# EAGLE board SparkFun RTK Facet - Display SD-Panel (EAGLE 9.6.2), part 1 of 3
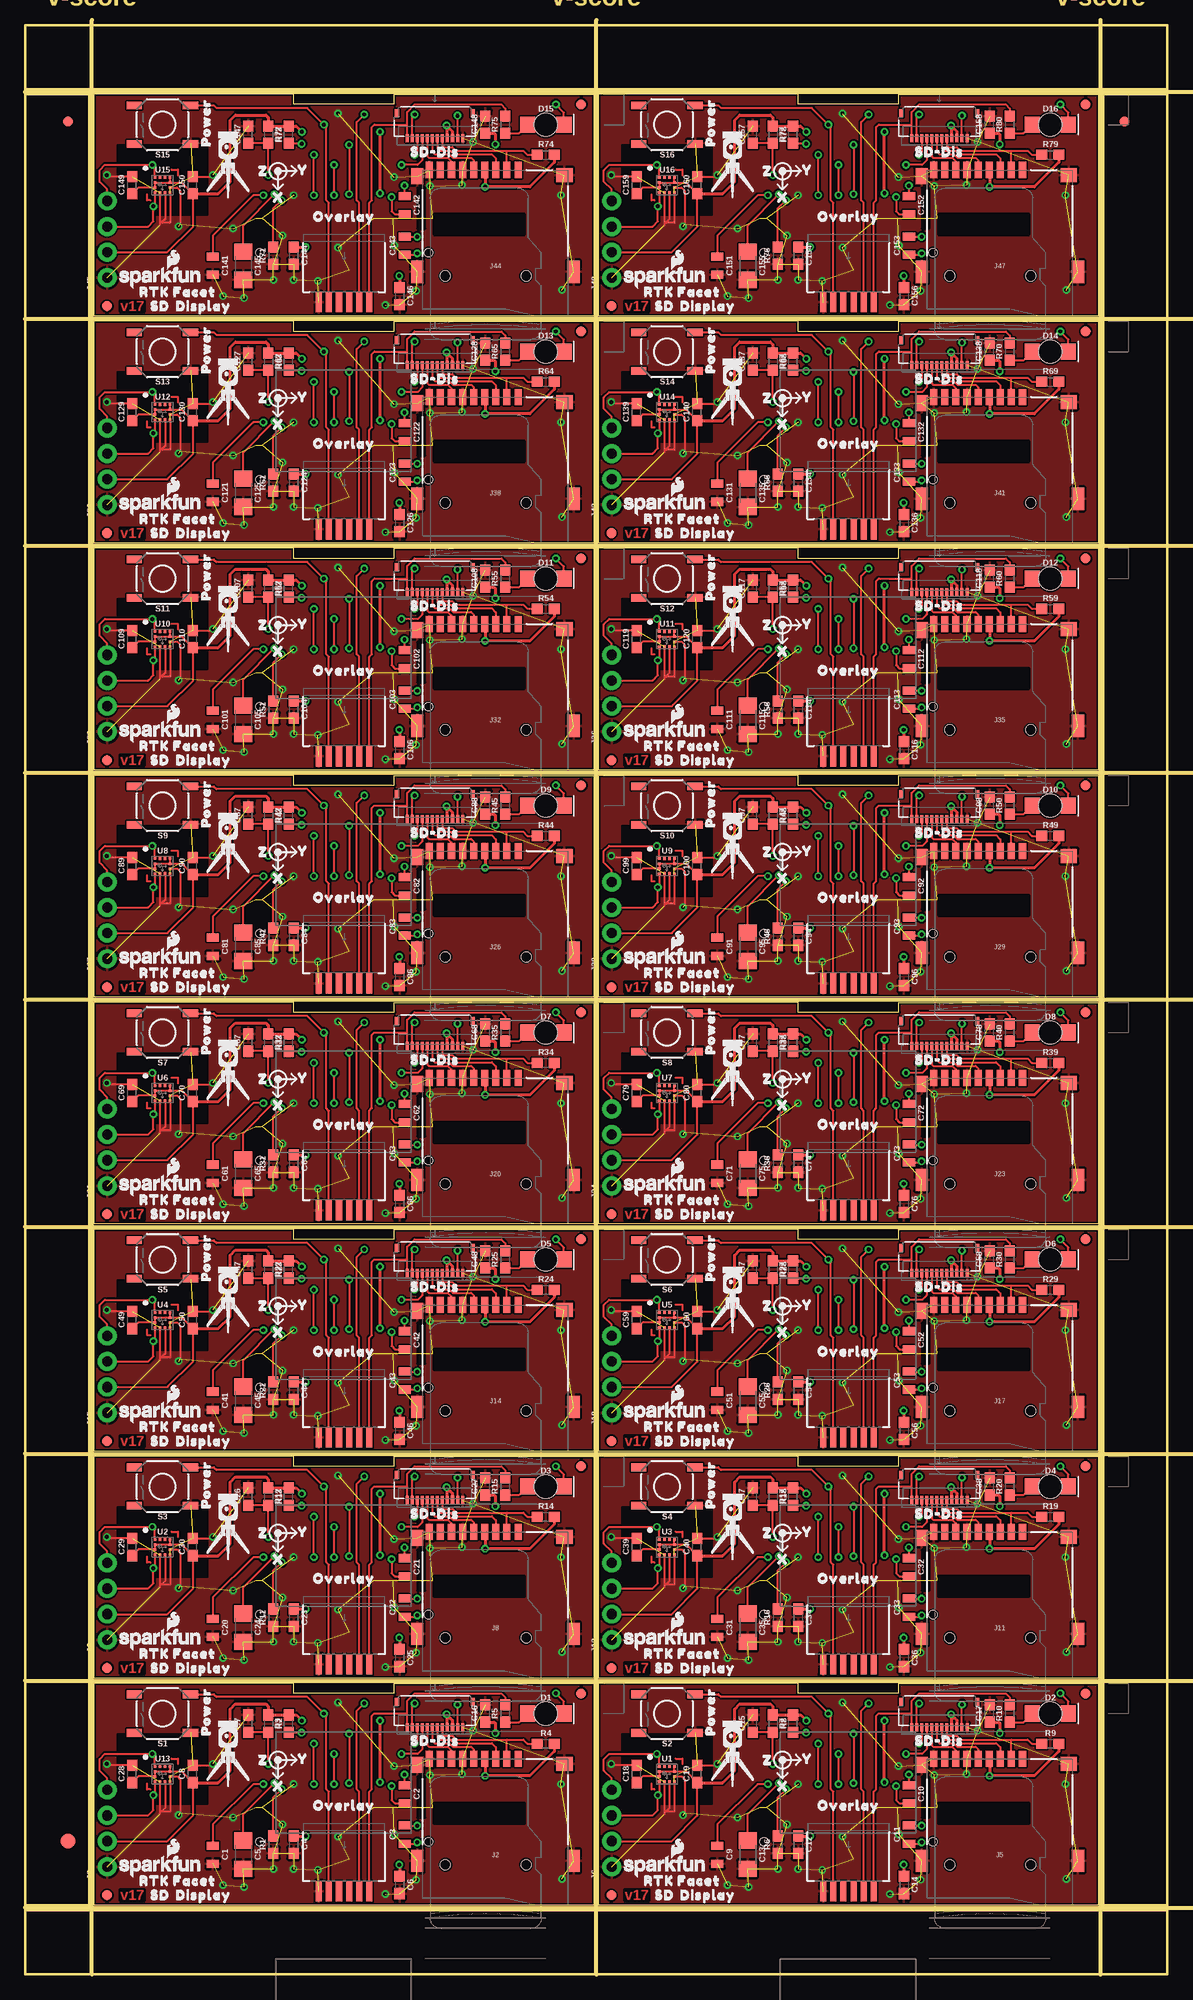
[diagram p0: board, top side]
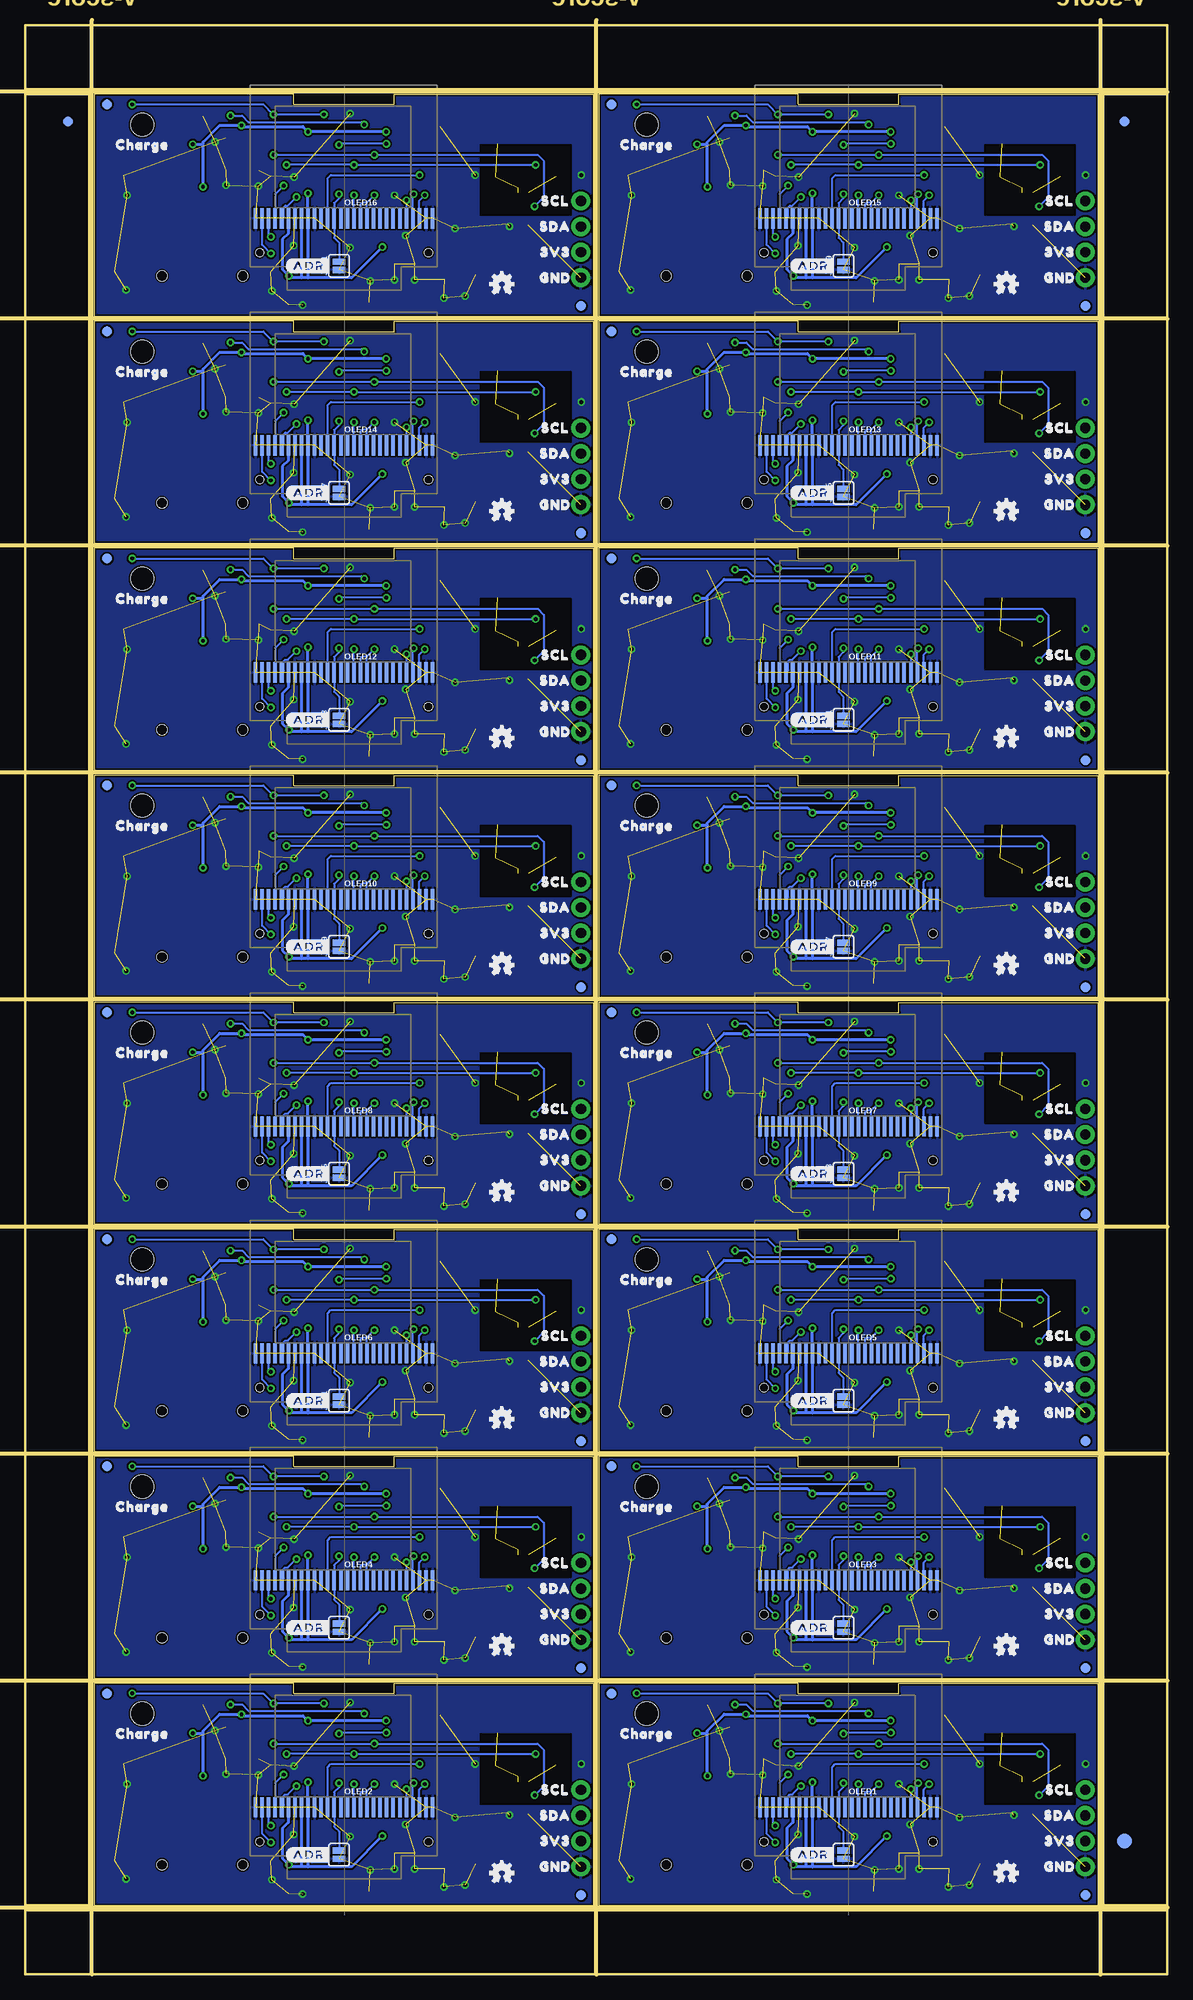
[diagram p1: board, bottom side, seen from below]

Size 113.22 x 193.27 mm. Coordinates in mm from the lower left corner, seen from the top.
Outline: 144 segments
Copper layers (1*16): Top 0.035mm / dielectric 1.5mm / Bottom 0.035mm
Design rules "SparkFun RTK Facet - Display SD": minimum track width 7mil, minimum drill 15mil, track to track 7mil, track to pad 7mil, pad to pad 7mil, via to via 7mil, smd to smd 7mil, copper to edge 7mil, drill to drill 7mil, minimum pad ring 7mil, minimum via ring 7mil, stop-mask expansion 4mil, vias tented up to drill 25mil, thermal gap 10mil
Net classes: 0 default: width 0.127 mm; 1 power: width 0.178 mm
tKeepout: area 54.4,6.9 to 56.4,28.9; area 6.9,6.9 to 8.9,28.9; area 104.4,6.9 to 106.4,28.9; area 56.9,6.9 to 58.9,28.9; area 54.4,29.4 to 56.4,51.4; area 6.9,29.4 to 8.9,51.4; area 104.4,29.4 to 106.4,51.4; area 56.9,29.4 to 58.9,51.4; area 54.4,51.9 to 56.4,73.9; area 6.9,51.9 to 8.9,73.9; area 104.4,51.9 to 106.4,73.9; area 56.9,51.9 to 58.9,73.9; 20 more areas
bKeepout: area 54.4,6.9 to 56.4,28.9; area 6.9,6.9 to 8.9,28.9; area 104.4,6.9 to 106.4,28.9; area 56.9,6.9 to 58.9,28.9; area 54.4,29.4 to 56.4,51.4; area 6.9,29.4 to 8.9,51.4; area 104.4,29.4 to 106.4,51.4; area 56.9,29.4 to 58.9,51.4; area 54.4,51.9 to 56.4,73.9; area 6.9,51.9 to 8.9,73.9; area 104.4,51.9 to 106.4,73.9; area 56.9,51.9 to 58.9,73.9; 20 more areas
Milling: 12 lines

## Footprints (pad centres in the part's own frame; a part is rotated, then mirrored left to right if it is on the bottom)
0805 = smd 0.8 x 1.2: 1 -0.9,0; 2 0.9,0
0603 = smd 1.1 x 1: 1 -0.85,0; 2 0.85,0
1206 = smd 1.6 x 1.8: 1 -1.4,0; 2 1.4,0
LED-1206-BOTTOM = smd 1.5 x 1.6: A -1.8,0; C 1.8,0 | hole 2.3: 0,0
FIDUCIAL-1X2 = smd 1 x 1: 1 0,0
FIDUCIAL-1.5X3 = smd 1.5 x 1.5: 1 0,0
FPC_12_DOUBLESIDED_BACKFLIP = smd 0.3 x 0.8: 1 -2.75,1.35; 2 -2.25,1.35; 3 -1.75,1.35; 4 -1.25,1.35; 5 -0.75,1.35; 6 -0.25,1.35; 7 0.25,1.35; 8 0.75,1.35; 9 1.25,1.35; 10 1.75,1.35; 11 2.25,1.35; 12 2.75,1.35 | smd 0.4 x 0.8: MP1 -3.75,-1.15; MP2 3.75,-1.15
MICROSD-EXTERNALPIN = smd 0.7 x 1.6: 1 2.25,10.5; 2 1.15,10.5; 3 0.05,10.5; 4 -1.05,10.5; 5 -2.15,10.5; 6 -3.25,10.5; 7 -4.35,10.5; 8 -5.45,10.5; 9 -6.55,10.5 | smd 1.2 x 1.6: 10 -7.75,9.9 | smd 1.2 x 2.2: 11 -7.75,0.4; 12 7.75,0.4 | smd 1.6 x 1.4: 13 6.85,10 | hole 1: 3.05,0; -4.95,0
1X04_NO_SILK = drill 1.016 pad 1.88: 1 0,0; 2 2.54,0; 3 5.08,0; 4 7.62,0
FPC_6_1MM-LIF = smd 0.6 x 2: 1 -2.5,3; 2 -1.5,3; 3 -0.5,3; 4 0.5,3; 5 1.5,3; 6 2.5,3
SMT-JUMPER_2_NO_SILK = smd 0.635 x 1.27: 1 -0.406,0; 2 0.406,0
OLED-0.66-64X48 = smd 0.35 x 2: 1 -8.775,0; 2 -8.125,0; 3 -7.475,0; 4 -6.825,0; 5 -6.175,0; 6 -5.525,0; 7 -4.875,0; 8 -4.225,0; 9 -3.575,0; 10 -2.925,0; 11 -2.275,0; 12 -1.625,0; 13 -0.975,0; 14 -0.325,0; 15 0.325,0; 16 0.975,0; 17 1.625,0; 18 2.275,0; 19 2.925,0; 20 3.575,0; 21 4.225,0; 22 4.875,0; 23 5.525,0; 24 6.175,0; 25 6.825,0; 26 7.475,0; 27 8.125,0; 28 8.775,0 | hole 0.8: 8.375,-3.4; -8.375,-3.4
TACTILE_SWITCH_SMD_5.2MM = smd 1.524 x 0.762: 1 -2.794,1.905; 2 2.794,1.905; 3 -2.794,-1.905; 4 2.794,-1.905
LGA-12-LISDH12-NOSILK = smd 0.275 x 0.25: 1 -0.75,0.75; 2 -0.75,0.25; 3 -0.75,-0.25; 4 -0.75,-0.75; 7 0.75,-0.75; 8 0.75,-0.25; 9 0.75,0.25; 10 0.75,0.75 | smd 0.25 x 0.275: 5 -0.25,-0.75; 6 0.25,-0.75; 11 0.25,0.75; 12 -0.25,0.75

## Placement (x,y rotation side)
C1  2.2uF  [0805]  18.61,11.86 270 top
C2  1.0uF  [0805]  37.61,17.86 270 top
C3  1.0uF  [0805]  37.61,13.86 90 top
C4  1.0uF  [0603]  26.61,12.86 270 top
C5  4.7uF  [1206]  21.61,11.86 270 top
C6  1.0uF  [0603]  37.11,8.86 270 top
C7  1.0uF  [0603]  22.11,24.86 90 top
C8  10uF  [0603]  16.61,19.86 90 top
C9  2.2uF  [0805]  68.62,11.86 270 top
C10  1.0uF  [0805]  87.62,17.86 270 top
C11  1.0uF  [0805]  87.62,13.86 90 top
C12  1.0uF  [0603]  76.62,12.86 270 top
C13  4.7uF  [1206]  71.62,11.86 270 top
C14  1.0uF  [0603]  87.12,8.86 270 top
C15  1.0uF  [0603]  72.12,24.86 90 top
C16  0.1uF  [0603]  45.61,25.86 90 top
C17  0.1uF  [0603]  95.62,25.86 90 top
C18  0.1uF  [0603]  60.62,19.86 90 top
C19  10uF  [0603]  66.62,19.86 90 top
C20  2.2uF  [0805]  18.61,34.36 270 top
C21  1.0uF  [0805]  37.61,40.36 270 top
C22  1.0uF  [0805]  37.61,36.36 90 top
C23  1.0uF  [0603]  26.61,35.36 270 top
C24  4.7uF  [1206]  21.61,34.36 270 top
C25  1.0uF  [0603]  37.11,31.36 270 top
C26  1.0uF  [0603]  22.11,47.36 90 top
C27  0.1uF  [0603]  45.61,48.36 90 top
C28  0.1uF  [0603]  10.61,19.86 90 top
C29  0.1uF  [0603]  10.61,42.36 90 top
C30  10uF  [0603]  16.61,42.36 90 top
C31  2.2uF  [0805]  68.62,34.36 270 top
C32  1.0uF  [0805]  87.62,40.36 270 top
C33  1.0uF  [0805]  87.62,36.36 90 top
C34  1.0uF  [0603]  76.62,35.36 270 top
C35  4.7uF  [1206]  71.62,34.36 270 top
C36  1.0uF  [0603]  87.12,31.36 270 top
C37  1.0uF  [0603]  72.12,47.36 90 top
C38  0.1uF  [0603]  95.62,48.36 90 top
C39  0.1uF  [0603]  60.62,42.36 90 top
C40  10uF  [0603]  66.62,42.36 90 top
C41  2.2uF  [0805]  18.61,56.87 270 top
C42  1.0uF  [0805]  37.61,62.87 270 top
C43  1.0uF  [0805]  37.61,58.87 90 top
C44  1.0uF  [0603]  26.61,57.87 270 top
C45  4.7uF  [1206]  21.61,56.87 270 top
C46  1.0uF  [0603]  37.11,53.87 270 top
C47  1.0uF  [0603]  22.11,69.87 90 top
C48  0.1uF  [0603]  45.61,70.87 90 top
C49  0.1uF  [0603]  10.61,64.87 90 top
C50  10uF  [0603]  16.61,64.87 90 top
C51  2.2uF  [0805]  68.62,56.87 270 top
C52  1.0uF  [0805]  87.62,62.87 270 top
C53  1.0uF  [0805]  87.62,58.87 90 top
C54  1.0uF  [0603]  76.62,57.87 270 top
C55  4.7uF  [1206]  71.62,56.87 270 top
C56  1.0uF  [0603]  87.12,53.87 270 top
C57  1.0uF  [0603]  72.12,69.87 90 top
C58  0.1uF  [0603]  95.62,70.87 90 top
C59  0.1uF  [0603]  60.62,64.87 90 top
C60  10uF  [0603]  66.62,64.87 90 top
C61  2.2uF  [0805]  18.61,79.38 270 top
C62  1.0uF  [0805]  37.61,85.38 270 top
C63  1.0uF  [0805]  37.61,81.38 90 top
C64  1.0uF  [0603]  26.61,80.38 270 top
C65  4.7uF  [1206]  21.61,79.38 270 top
C66  1.0uF  [0603]  37.11,76.38 270 top
C67  1.0uF  [0603]  22.11,92.38 90 top
C68  0.1uF  [0603]  45.61,93.38 90 top
C69  0.1uF  [0603]  10.61,87.38 90 top
C70  10uF  [0603]  16.61,87.38 90 top
C71  2.2uF  [0805]  68.62,79.38 270 top
C72  1.0uF  [0805]  87.62,85.38 270 top
C73  1.0uF  [0805]  87.62,81.38 90 top
C74  1.0uF  [0603]  76.62,80.38 270 top
C75  4.7uF  [1206]  71.62,79.38 270 top
C76  1.0uF  [0603]  87.12,76.38 270 top
C77  1.0uF  [0603]  72.12,92.38 90 top
C78  0.1uF  [0603]  95.62,93.38 90 top
C79  0.1uF  [0603]  60.62,87.38 90 top
C80  10uF  [0603]  66.62,87.38 90 top
C81  2.2uF  [0805]  18.61,101.89 270 top
C82  1.0uF  [0805]  37.61,107.89 270 top
C83  1.0uF  [0805]  37.61,103.89 90 top
C84  1.0uF  [0603]  26.61,102.89 270 top
C85  4.7uF  [1206]  21.61,101.89 270 top
C86  1.0uF  [0603]  37.11,98.89 270 top
C87  1.0uF  [0603]  22.11,114.89 90 top
C88  0.1uF  [0603]  45.61,115.89 90 top
C89  0.1uF  [0603]  10.61,109.89 90 top
C90  10uF  [0603]  16.61,109.89 90 top
C91  2.2uF  [0805]  68.62,101.89 270 top
C92  1.0uF  [0805]  87.62,107.89 270 top
C93  1.0uF  [0805]  87.62,103.89 90 top
C94  1.0uF  [0603]  76.62,102.89 270 top
C95  4.7uF  [1206]  71.62,101.89 270 top
C96  1.0uF  [0603]  87.12,98.89 270 top
C97  1.0uF  [0603]  72.12,114.89 90 top
C98  0.1uF  [0603]  95.62,115.89 90 top
C99  0.1uF  [0603]  60.62,109.89 90 top
C100  10uF  [0603]  66.62,109.89 90 top
C101  2.2uF  [0805]  18.61,124.4 270 top
C102  1.0uF  [0805]  37.61,130.4 270 top
C103  1.0uF  [0805]  37.61,126.4 90 top
C104  1.0uF  [0603]  26.61,125.4 270 top
C105  4.7uF  [1206]  21.61,124.4 270 top
C106  1.0uF  [0603]  37.11,121.4 270 top
C107  1.0uF  [0603]  22.11,137.4 90 top
C108  0.1uF  [0603]  45.61,138.4 90 top
C109  0.1uF  [0603]  10.61,132.4 90 top
C110  10uF  [0603]  16.61,132.4 90 top
C111  2.2uF  [0805]  68.62,124.4 270 top
C112  1.0uF  [0805]  87.62,130.4 270 top
C113  1.0uF  [0805]  87.62,126.4 90 top
C114  1.0uF  [0603]  76.62,125.4 270 top
C115  4.7uF  [1206]  71.62,124.4 270 top
C116  1.0uF  [0603]  87.12,121.4 270 top
C117  1.0uF  [0603]  72.12,137.4 90 top
C118  0.1uF  [0603]  95.62,138.4 90 top
C119  0.1uF  [0603]  60.62,132.4 90 top
C120  10uF  [0603]  66.62,132.4 90 top
C121  2.2uF  [0805]  18.61,146.91 270 top
C122  1.0uF  [0805]  37.61,152.91 270 top
C123  1.0uF  [0805]  37.61,148.91 90 top
C124  1.0uF  [0603]  26.61,147.91 270 top
C125  4.7uF  [1206]  21.61,146.91 270 top
C126  1.0uF  [0603]  37.11,143.91 270 top
C127  1.0uF  [0603]  22.11,159.91 90 top
C128  0.1uF  [0603]  45.61,160.91 90 top
C129  0.1uF  [0603]  10.61,154.91 90 top
C130  10uF  [0603]  16.61,154.91 90 top
C131  2.2uF  [0805]  68.62,146.91 270 top
C132  1.0uF  [0805]  87.62,152.91 270 top
C133  1.0uF  [0805]  87.62,148.91 90 top
C134  1.0uF  [0603]  76.62,147.91 270 top
C135  4.7uF  [1206]  71.62,146.91 270 top
C136  1.0uF  [0603]  87.12,143.91 270 top
C137  1.0uF  [0603]  72.12,159.91 90 top
C138  0.1uF  [0603]  95.62,160.91 90 top
C139  0.1uF  [0603]  60.62,154.91 90 top
C140  10uF  [0603]  66.62,154.91 90 top
C141  2.2uF  [0805]  18.61,169.41 270 top
C142  1.0uF  [0805]  37.61,175.41 270 top
C143  1.0uF  [0805]  37.61,171.41 90 top
C144  1.0uF  [0603]  26.61,170.41 270 top
C145  4.7uF  [1206]  21.61,169.41 270 top
C146  1.0uF  [0603]  37.11,166.41 270 top
C147  1.0uF  [0603]  22.11,182.41 90 top
C148  0.1uF  [0603]  45.61,183.41 90 top
C149  0.1uF  [0603]  10.61,177.41 90 top
C150  10uF  [0603]  16.61,177.41 90 top
C151  2.2uF  [0805]  68.62,169.41 270 top
C152  1.0uF  [0805]  87.62,175.41 270 top
C153  1.0uF  [0805]  87.62,171.41 90 top
C154  1.0uF  [0603]  76.62,170.41 270 top
C155  4.7uF  [1206]  71.62,169.41 270 top
C156  1.0uF  [0603]  87.12,166.41 270 top
C157  1.0uF  [0603]  72.12,182.41 90 top
C158  0.1uF  [0603]  95.62,183.41 90 top
C159  0.1uF  [0603]  60.62,177.41 90 top
C160  10uF  [0603]  66.62,177.41 90 top
D1  Green  [LED-1206-BOTTOM]  51.61,25.86 0 top
D2  Green  [LED-1206-BOTTOM]  101.62,25.86 0 top
D3  Green  [LED-1206-BOTTOM]  51.61,48.36 0 top
D4  Green  [LED-1206-BOTTOM]  101.62,48.36 0 top
D5  Green  [LED-1206-BOTTOM]  51.61,70.87 0 top
D6  Green  [LED-1206-BOTTOM]  101.62,70.87 0 top
D7  Green  [LED-1206-BOTTOM]  51.61,93.38 0 top
D8  Green  [LED-1206-BOTTOM]  101.62,93.38 0 top
D9  Green  [LED-1206-BOTTOM]  51.61,115.89 0 top
D10  Green  [LED-1206-BOTTOM]  101.62,115.89 0 top
D11  Green  [LED-1206-BOTTOM]  51.61,138.4 0 top
D12  Green  [LED-1206-BOTTOM]  101.62,138.4 0 top
D13  Green  [LED-1206-BOTTOM]  51.61,160.91 0 top
D14  Green  [LED-1206-BOTTOM]  101.62,160.91 0 top
D15  Green  [LED-1206-BOTTOM]  51.61,183.41 0 top
D16  Green  [LED-1206-BOTTOM]  101.62,183.41 0 top
E$1  [FIDUCIAL-1X2]  4.23,183.75 0 top
E$2  [FIDUCIAL-1X2]  4.23,183.75 0 bottom
E$3  [FIDUCIAL-1X2]  108.99,183.75 0 top
E$4  [FIDUCIAL-1X2]  108.99,183.75 0 bottom
E$5  [FIDUCIAL-1.5X3]  4.23,13.21 0 top
E$6  [FIDUCIAL-1.5X3]  4.23,13.21 0 bottom
FID1  FIDUCIAL1X2  [FIDUCIAL-1X2]  8.11,7.86 0 bottom
FID2  FIDUCIAL1X2  [FIDUCIAL-1X2]  55.11,27.86 0 bottom
FID3  FIDUCIAL1X2  [FIDUCIAL-1X2]  55.11,27.86 0 top
FID4  FIDUCIAL1X2  [FIDUCIAL-1X2]  8.11,7.86 0 top
FID5  FIDUCIAL1X2  [FIDUCIAL-1X2]  58.12,7.86 0 bottom
FID6  FIDUCIAL1X2  [FIDUCIAL-1X2]  105.12,27.86 0 bottom
FID7  FIDUCIAL1X2  [FIDUCIAL-1X2]  105.12,27.86 0 top
FID8  FIDUCIAL1X2  [FIDUCIAL-1X2]  58.12,7.86 0 top
FID9  FIDUCIAL1X2  [FIDUCIAL-1X2]  8.11,30.36 0 bottom
FID10  FIDUCIAL1X2  [FIDUCIAL-1X2]  55.11,50.36 0 bottom
FID11  FIDUCIAL1X2  [FIDUCIAL-1X2]  55.11,50.36 0 top
FID12  FIDUCIAL1X2  [FIDUCIAL-1X2]  8.11,30.36 0 top
FID13  FIDUCIAL1X2  [FIDUCIAL-1X2]  58.12,30.36 0 bottom
FID14  FIDUCIAL1X2  [FIDUCIAL-1X2]  105.12,50.36 0 bottom
FID15  FIDUCIAL1X2  [FIDUCIAL-1X2]  105.12,50.36 0 top
FID16  FIDUCIAL1X2  [FIDUCIAL-1X2]  58.12,30.36 0 top
FID17  FIDUCIAL1X2  [FIDUCIAL-1X2]  8.11,52.87 0 bottom
FID18  FIDUCIAL1X2  [FIDUCIAL-1X2]  55.11,72.87 0 bottom
FID19  FIDUCIAL1X2  [FIDUCIAL-1X2]  55.11,72.87 0 top
FID20  FIDUCIAL1X2  [FIDUCIAL-1X2]  8.11,52.87 0 top
FID21  FIDUCIAL1X2  [FIDUCIAL-1X2]  58.12,52.87 0 bottom
FID22  FIDUCIAL1X2  [FIDUCIAL-1X2]  105.12,72.87 0 bottom
FID23  FIDUCIAL1X2  [FIDUCIAL-1X2]  105.12,72.87 0 top
FID24  FIDUCIAL1X2  [FIDUCIAL-1X2]  58.12,52.87 0 top
FID25  FIDUCIAL1X2  [FIDUCIAL-1X2]  8.11,75.38 0 bottom
FID26  FIDUCIAL1X2  [FIDUCIAL-1X2]  55.11,95.38 0 bottom
FID27  FIDUCIAL1X2  [FIDUCIAL-1X2]  55.11,95.38 0 top
FID28  FIDUCIAL1X2  [FIDUCIAL-1X2]  8.11,75.38 0 top
FID29  FIDUCIAL1X2  [FIDUCIAL-1X2]  58.12,75.38 0 bottom
FID30  FIDUCIAL1X2  [FIDUCIAL-1X2]  105.12,95.38 0 bottom
FID31  FIDUCIAL1X2  [FIDUCIAL-1X2]  105.12,95.38 0 top
FID32  FIDUCIAL1X2  [FIDUCIAL-1X2]  58.12,75.38 0 top
FID33  FIDUCIAL1X2  [FIDUCIAL-1X2]  8.11,97.89 0 bottom
FID34  FIDUCIAL1X2  [FIDUCIAL-1X2]  55.11,117.89 0 bottom
FID35  FIDUCIAL1X2  [FIDUCIAL-1X2]  55.11,117.89 0 top
FID36  FIDUCIAL1X2  [FIDUCIAL-1X2]  8.11,97.89 0 top
FID37  FIDUCIAL1X2  [FIDUCIAL-1X2]  58.12,97.89 0 bottom
FID38  FIDUCIAL1X2  [FIDUCIAL-1X2]  105.12,117.89 0 bottom
FID39  FIDUCIAL1X2  [FIDUCIAL-1X2]  105.12,117.89 0 top
FID40  FIDUCIAL1X2  [FIDUCIAL-1X2]  58.12,97.89 0 top
FID41  FIDUCIAL1X2  [FIDUCIAL-1X2]  8.11,120.4 0 bottom
FID42  FIDUCIAL1X2  [FIDUCIAL-1X2]  55.11,140.4 0 bottom
FID43  FIDUCIAL1X2  [FIDUCIAL-1X2]  55.11,140.4 0 top
FID44  FIDUCIAL1X2  [FIDUCIAL-1X2]  8.11,120.4 0 top
FID45  FIDUCIAL1X2  [FIDUCIAL-1X2]  58.12,120.4 0 bottom
FID46  FIDUCIAL1X2  [FIDUCIAL-1X2]  105.12,140.4 0 bottom
FID47  FIDUCIAL1X2  [FIDUCIAL-1X2]  105.12,140.4 0 top
FID48  FIDUCIAL1X2  [FIDUCIAL-1X2]  58.12,120.4 0 top
FID49  FIDUCIAL1X2  [FIDUCIAL-1X2]  8.11,142.91 0 bottom
FID50  FIDUCIAL1X2  [FIDUCIAL-1X2]  55.11,162.91 0 bottom
FID51  FIDUCIAL1X2  [FIDUCIAL-1X2]  55.11,162.91 0 top
FID52  FIDUCIAL1X2  [FIDUCIAL-1X2]  8.11,142.91 0 top
FID53  FIDUCIAL1X2  [FIDUCIAL-1X2]  58.12,142.91 0 bottom
FID54  FIDUCIAL1X2  [FIDUCIAL-1X2]  105.12,162.91 0 bottom
FID55  FIDUCIAL1X2  [FIDUCIAL-1X2]  105.12,162.91 0 top
FID56  FIDUCIAL1X2  [FIDUCIAL-1X2]  58.12,142.91 0 top
FID57  FIDUCIAL1X2  [FIDUCIAL-1X2]  8.11,165.41 0 bottom
FID58  FIDUCIAL1X2  [FIDUCIAL-1X2]  55.11,185.41 0 bottom
FID59  FIDUCIAL1X2  [FIDUCIAL-1X2]  55.11,185.41 0 top
FID60  FIDUCIAL1X2  [FIDUCIAL-1X2]  8.11,165.41 0 top
FID61  FIDUCIAL1X2  [FIDUCIAL-1X2]  58.12,165.41 0 bottom
FID62  FIDUCIAL1X2  [FIDUCIAL-1X2]  105.12,185.41 0 bottom
FID63  FIDUCIAL1X2  [FIDUCIAL-1X2]  105.12,185.41 0 top
FID64  FIDUCIAL1X2  [FIDUCIAL-1X2]  58.12,165.41 0 top
J1  FPC_12_0.5MM_BACKFLIP  [FPC_12_DOUBLESIDED_BACKFLIP]  40.61,25.86 180 top
J2  MICRO-SD-PUSH-PUSH-EXT-PIN  [MICROSD-EXTERNALPIN]  46.61,10.86 0 top
J3  [1X04_NO_SILK]  8.13,10.67 90 top
J4  FPC_12_0.5MM_BACKFLIP  [FPC_12_DOUBLESIDED_BACKFLIP]  90.62,25.86 180 top
J5  MICRO-SD-PUSH-PUSH-EXT-PIN  [MICROSD-EXTERNALPIN]  96.62,10.86 0 top
J6  [1X04_NO_SILK]  58.14,10.67 90 top
J7  FPC_12_0.5MM_BACKFLIP  [FPC_12_DOUBLESIDED_BACKFLIP]  40.61,48.36 180 top
J8  MICRO-SD-PUSH-PUSH-EXT-PIN  [MICROSD-EXTERNALPIN]  46.61,33.36 0 top
J9  [1X04_NO_SILK]  8.13,33.17 90 top
J10  FPC_12_0.5MM_BACKFLIP  [FPC_12_DOUBLESIDED_BACKFLIP]  90.62,48.36 180 top
J11  MICRO-SD-PUSH-PUSH-EXT-PIN  [MICROSD-EXTERNALPIN]  96.62,33.36 0 top
J12  [1X04_NO_SILK]  58.14,33.17 90 top
J13  FPC_12_0.5MM_BACKFLIP  [FPC_12_DOUBLESIDED_BACKFLIP]  40.61,70.87 180 top
J14  MICRO-SD-PUSH-PUSH-EXT-PIN  [MICROSD-EXTERNALPIN]  46.61,55.87 0 top
J15  [1X04_NO_SILK]  8.13,55.68 90 top
J16  FPC_12_0.5MM_BACKFLIP  [FPC_12_DOUBLESIDED_BACKFLIP]  90.62,70.87 180 top
J17  MICRO-SD-PUSH-PUSH-EXT-PIN  [MICROSD-EXTERNALPIN]  96.62,55.87 0 top
J18  [1X04_NO_SILK]  58.14,55.68 90 top
J19  FPC_12_0.5MM_BACKFLIP  [FPC_12_DOUBLESIDED_BACKFLIP]  40.61,93.38 180 top
J20  MICRO-SD-PUSH-PUSH-EXT-PIN  [MICROSD-EXTERNALPIN]  46.61,78.38 0 top
J21  [1X04_NO_SILK]  8.13,78.19 90 top
J22  FPC_12_0.5MM_BACKFLIP  [FPC_12_DOUBLESIDED_BACKFLIP]  90.62,93.38 180 top
J23  MICRO-SD-PUSH-PUSH-EXT-PIN  [MICROSD-EXTERNALPIN]  96.62,78.38 0 top
J24  [1X04_NO_SILK]  58.14,78.19 90 top
J25  FPC_12_0.5MM_BACKFLIP  [FPC_12_DOUBLESIDED_BACKFLIP]  40.61,115.89 180 top
J26  MICRO-SD-PUSH-PUSH-EXT-PIN  [MICROSD-EXTERNALPIN]  46.61,100.89 0 top
J27  [1X04_NO_SILK]  8.13,100.7 90 top
J28  FPC_12_0.5MM_BACKFLIP  [FPC_12_DOUBLESIDED_BACKFLIP]  90.62,115.89 180 top
J29  MICRO-SD-PUSH-PUSH-EXT-PIN  [MICROSD-EXTERNALPIN]  96.62,100.89 0 top
J30  [1X04_NO_SILK]  58.14,100.7 90 top
J31  FPC_12_0.5MM_BACKFLIP  [FPC_12_DOUBLESIDED_BACKFLIP]  40.61,138.4 180 top
J32  MICRO-SD-PUSH-PUSH-EXT-PIN  [MICROSD-EXTERNALPIN]  46.61,123.4 0 top
J33  [1X04_NO_SILK]  8.13,123.21 90 top
J34  FPC_12_0.5MM_BACKFLIP  [FPC_12_DOUBLESIDED_BACKFLIP]  90.62,138.4 180 top
J35  MICRO-SD-PUSH-PUSH-EXT-PIN  [MICROSD-EXTERNALPIN]  96.62,123.4 0 top
J36  [1X04_NO_SILK]  58.14,123.21 90 top
J37  FPC_12_0.5MM_BACKFLIP  [FPC_12_DOUBLESIDED_BACKFLIP]  40.61,160.91 180 top
J38  MICRO-SD-PUSH-PUSH-EXT-PIN  [MICROSD-EXTERNALPIN]  46.61,145.91 0 top
J39  [1X04_NO_SILK]  8.13,145.72 90 top
J40  FPC_12_0.5MM_BACKFLIP  [FPC_12_DOUBLESIDED_BACKFLIP]  90.62,160.91 180 top
J41  MICRO-SD-PUSH-PUSH-EXT-PIN  [MICROSD-EXTERNALPIN]  96.62,145.91 0 top
J42  [1X04_NO_SILK]  58.14,145.72 90 top
J43  FPC_12_0.5MM_BACKFLIP  [FPC_12_DOUBLESIDED_BACKFLIP]  40.61,183.41 180 top
J44  MICRO-SD-PUSH-PUSH-EXT-PIN  [MICROSD-EXTERNALPIN]  46.61,168.41 0 top
J45  [1X04_NO_SILK]  8.13,168.22 90 top
J46  FPC_12_0.5MM_BACKFLIP  [FPC_12_DOUBLESIDED_BACKFLIP]  90.62,183.41 180 top
J47  MICRO-SD-PUSH-PUSH-EXT-PIN  [MICROSD-EXTERNALPIN]  96.62,168.41 0 top
J48  [1X04_NO_SILK]  58.14,168.22 90 top
JP1  [FPC_6_1MM-LIF]  31.61,11.24 180 top
JP2  JUMPER-SMT_2_NO_SILK  [SMT-JUMPER_2_NO_SILK]  82.12,11.86 90 bottom
JP3  JUMPER-SMT_2_NO_SILK  [SMT-JUMPER_2_NO_SILK]  32.11,11.86 90 bottom
JP4  [FPC_6_1MM-LIF]  81.62,11.24 180 top
JP5  JUMPER-SMT_2_NO_SILK  [SMT-JUMPER_2_NO_SILK]  32.11,34.36 90 bottom
JP6  [FPC_6_1MM-LIF]  31.61,33.74 180 top
JP7  JUMPER-SMT_2_NO_SILK  [SMT-JUMPER_2_NO_SILK]  82.12,34.36 90 bottom
JP8  [FPC_6_1MM-LIF]  81.62,33.74 180 top
JP9  JUMPER-SMT_2_NO_SILK  [SMT-JUMPER_2_NO_SILK]  32.11,56.87 90 bottom
JP10  [FPC_6_1MM-LIF]  31.61,56.25 180 top
JP11  JUMPER-SMT_2_NO_SILK  [SMT-JUMPER_2_NO_SILK]  82.12,56.87 90 bottom
JP12  [FPC_6_1MM-LIF]  81.62,56.25 180 top
JP13  JUMPER-SMT_2_NO_SILK  [SMT-JUMPER_2_NO_SILK]  32.11,79.38 90 bottom
JP14  [FPC_6_1MM-LIF]  31.61,78.76 180 top
JP15  JUMPER-SMT_2_NO_SILK  [SMT-JUMPER_2_NO_SILK]  82.12,79.38 90 bottom
JP16  [FPC_6_1MM-LIF]  81.62,78.76 180 top
JP17  JUMPER-SMT_2_NO_SILK  [SMT-JUMPER_2_NO_SILK]  32.11,101.89 90 bottom
JP18  [FPC_6_1MM-LIF]  31.61,101.27 180 top
JP19  JUMPER-SMT_2_NO_SILK  [SMT-JUMPER_2_NO_SILK]  82.12,101.89 90 bottom
JP20  [FPC_6_1MM-LIF]  81.62,101.27 180 top
JP21  JUMPER-SMT_2_NO_SILK  [SMT-JUMPER_2_NO_SILK]  32.11,124.4 90 bottom
JP22  [FPC_6_1MM-LIF]  31.61,123.78 180 top
JP23  JUMPER-SMT_2_NO_SILK  [SMT-JUMPER_2_NO_SILK]  82.12,124.4 90 bottom
JP24  [FPC_6_1MM-LIF]  81.62,123.78 180 top
JP25  JUMPER-SMT_2_NO_SILK  [SMT-JUMPER_2_NO_SILK]  32.11,146.91 90 bottom
JP26  [FPC_6_1MM-LIF]  31.61,146.29 180 top
JP27  JUMPER-SMT_2_NO_SILK  [SMT-JUMPER_2_NO_SILK]  82.12,146.91 90 bottom
JP28  [FPC_6_1MM-LIF]  81.62,146.29 180 top
JP29  JUMPER-SMT_2_NO_SILK  [SMT-JUMPER_2_NO_SILK]  32.11,169.41 90 bottom
JP30  [FPC_6_1MM-LIF]  31.61,168.79 180 top
JP31  JUMPER-SMT_2_NO_SILK  [SMT-JUMPER_2_NO_SILK]  82.12,169.41 90 bottom
JP32  [FPC_6_1MM-LIF]  81.62,168.79 180 top
LOGO1  OSHW-LOGOMINI  [OSHW-LOGO-MINI]  65.97,10.05 0 bottom
LOGO2  SFE_LOGO_NAME_FLAME8_MM  [SFE_LOGO_NAME_FLAME_8MM]  63.34,10.79 0 top
LOGO3  OSHW-LOGOMINI  [OSHW-LOGO-MINI]  15.96,10.05 0 bottom
LOGO4  OSHW-LOGOMINI  [OSHW-LOGO-MINI]  15.96,32.55 0 bottom
LOGO5  SFE_LOGO_NAME_FLAME8_MM  [SFE_LOGO_NAME_FLAME_8MM]  13.34,10.79 0 top
LOGO6  SFE_LOGO_NAME_FLAME8_MM  [SFE_LOGO_NAME_FLAME_8MM]  13.34,33.3 0 top
LOGO7  OSHW-LOGOMINI  [OSHW-LOGO-MINI]  65.97,32.55 0 bottom
LOGO8  SFE_LOGO_NAME_FLAME8_MM  [SFE_LOGO_NAME_FLAME_8MM]  63.34,33.3 0 top
LOGO9  OSHW-LOGOMINI  [OSHW-LOGO-MINI]  15.96,55.06 0 bottom
LOGO10  SFE_LOGO_NAME_FLAME8_MM  [SFE_LOGO_NAME_FLAME_8MM]  13.34,55.81 0 top
LOGO11  OSHW-LOGOMINI  [OSHW-LOGO-MINI]  65.97,55.06 0 bottom
LOGO12  SFE_LOGO_NAME_FLAME8_MM  [SFE_LOGO_NAME_FLAME_8MM]  63.34,55.81 0 top
LOGO13  OSHW-LOGOMINI  [OSHW-LOGO-MINI]  15.96,77.57 0 bottom
LOGO14  SFE_LOGO_NAME_FLAME8_MM  [SFE_LOGO_NAME_FLAME_8MM]  13.34,78.32 0 top
LOGO15  OSHW-LOGOMINI  [OSHW-LOGO-MINI]  65.97,77.57 0 bottom
LOGO16  SFE_LOGO_NAME_FLAME8_MM  [SFE_LOGO_NAME_FLAME_8MM]  63.34,78.32 0 top
LOGO17  OSHW-LOGOMINI  [OSHW-LOGO-MINI]  15.96,100.08 0 bottom
LOGO18  SFE_LOGO_NAME_FLAME8_MM  [SFE_LOGO_NAME_FLAME_8MM]  13.34,100.83 0 top
LOGO19  OSHW-LOGOMINI  [OSHW-LOGO-MINI]  65.97,100.08 0 bottom
LOGO20  SFE_LOGO_NAME_FLAME8_MM  [SFE_LOGO_NAME_FLAME_8MM]  63.34,100.83 0 top
LOGO21  OSHW-LOGOMINI  [OSHW-LOGO-MINI]  15.96,122.59 0 bottom
LOGO22  SFE_LOGO_NAME_FLAME8_MM  [SFE_LOGO_NAME_FLAME_8MM]  13.34,123.33 0 top
LOGO23  OSHW-LOGOMINI  [OSHW-LOGO-MINI]  65.97,122.59 0 bottom
LOGO24  SFE_LOGO_NAME_FLAME8_MM  [SFE_LOGO_NAME_FLAME_8MM]  63.34,123.33 0 top
LOGO25  OSHW-LOGOMINI  [OSHW-LOGO-MINI]  15.96,145.1 0 bottom
LOGO26  SFE_LOGO_NAME_FLAME8_MM  [SFE_LOGO_NAME_FLAME_8MM]  13.34,145.84 0 top
LOGO27  OSHW-LOGOMINI  [OSHW-LOGO-MINI]  65.97,145.1 0 bottom
LOGO28  SFE_LOGO_NAME_FLAME8_MM  [SFE_LOGO_NAME_FLAME_8MM]  63.34,145.84 0 top
LOGO29  OSHW-LOGOMINI  [OSHW-LOGO-MINI]  15.96,167.6 0 bottom
LOGO30  SFE_LOGO_NAME_FLAME8_MM  [SFE_LOGO_NAME_FLAME_8MM]  13.34,168.35 0 top
LOGO31  OSHW-LOGOMINI  [OSHW-LOGO-MINI]  65.97,167.6 0 bottom
LOGO32  SFE_LOGO_NAME_FLAME8_MM  [SFE_LOGO_NAME_FLAME_8MM]  63.34,168.35 0 top
OLED1  OLED0.66  [OLED-0.66-64X48]  31.61,16.56 0 bottom
OLED2  OLED0.66  [OLED-0.66-64X48]  81.62,16.56 0 bottom
OLED3  OLED0.66  [OLED-0.66-64X48]  31.61,39.06 0 bottom
OLED4  OLED0.66  [OLED-0.66-64X48]  81.62,39.06 0 bottom
OLED5  OLED0.66  [OLED-0.66-64X48]  31.61,61.57 0 bottom
OLED6  OLED0.66  [OLED-0.66-64X48]  81.62,61.57 0 bottom
OLED7  OLED0.66  [OLED-0.66-64X48]  31.61,84.08 0 bottom
OLED8  OLED0.66  [OLED-0.66-64X48]  81.62,84.08 0 bottom
OLED9  OLED0.66  [OLED-0.66-64X48]  31.61,106.59 0 bottom
OLED10  OLED0.66  [OLED-0.66-64X48]  81.62,106.59 0 bottom
OLED11  OLED0.66  [OLED-0.66-64X48]  31.61,129.1 0 bottom
OLED12  OLED0.66  [OLED-0.66-64X48]  81.62,129.1 0 bottom
OLED13  OLED0.66  [OLED-0.66-64X48]  31.61,151.61 0 bottom
OLED14  OLED0.66  [OLED-0.66-64X48]  81.62,151.61 0 bottom
OLED15  OLED0.66  [OLED-0.66-64X48]  31.61,174.11 0 bottom
OLED16  OLED0.66  [OLED-0.66-64X48]  81.62,174.11 0 bottom
R1  390k  [0603]  24.61,12.86 90 top
R2  10k  [0603]  24.11,24.86 270 top
R3  10k  [0603]  26.11,24.86 90 top
R4  100k  [0603]  51.61,22.86 0 top
R5  1k  [0603]  47.61,25.86 90 top
R6  390k  [0603]  74.62,12.86 90 top
R7  10k  [0603]  76.12,24.86 90 top
R8  10k  [0603]  74.12,24.86 270 top
R9  100k  [0603]  101.62,22.86 0 top
R10  1k  [0603]  97.62,25.86 90 top
R11  390k  [0603]  24.61,35.36 90 top
R12  10k  [0603]  26.11,47.36 90 top
R13  10k  [0603]  24.11,47.36 270 top
R14  100k  [0603]  51.61,45.36 0 top
R15  1k  [0603]  47.61,48.36 90 top
R16  390k  [0603]  74.62,35.36 90 top
R17  10k  [0603]  76.12,47.36 90 top
R18  10k  [0603]  74.12,47.36 270 top
R19  100k  [0603]  101.62,45.36 0 top
R20  1k  [0603]  97.62,48.36 90 top
R21  390k  [0603]  24.61,57.87 90 top
R22  10k  [0603]  26.11,69.87 90 top
R23  10k  [0603]  24.11,69.87 270 top
R24  100k  [0603]  51.61,67.87 0 top
R25  1k  [0603]  47.61,70.87 90 top
R26  390k  [0603]  74.62,57.87 90 top
R27  10k  [0603]  76.12,69.87 90 top
R28  10k  [0603]  74.12,69.87 270 top
R29  100k  [0603]  101.62,67.87 0 top
R30  1k  [0603]  97.62,70.87 90 top
R31  390k  [0603]  24.61,80.38 90 top
R32  10k  [0603]  26.11,92.38 90 top
R33  10k  [0603]  24.11,92.38 270 top
R34  100k  [0603]  51.61,90.38 0 top
R35  1k  [0603]  47.61,93.38 90 top
R36  390k  [0603]  74.62,80.38 90 top
R37  10k  [0603]  76.12,92.38 90 top
R38  10k  [0603]  74.12,92.38 270 top
R39  100k  [0603]  101.62,90.38 0 top
R40  1k  [0603]  97.62,93.38 90 top
R41  390k  [0603]  24.61,102.89 90 top
R42  10k  [0603]  26.11,114.89 90 top
R43  10k  [0603]  24.11,114.89 270 top
R44  100k  [0603]  51.61,112.89 0 top
R45  1k  [0603]  47.61,115.89 90 top
R46  390k  [0603]  74.62,102.89 90 top
R47  10k  [0603]  76.12,114.89 90 top
R48  10k  [0603]  74.12,114.89 270 top
R49  100k  [0603]  101.62,112.89 0 top
R50  1k  [0603]  97.62,115.89 90 top
R51  390k  [0603]  24.61,125.4 90 top
R52  10k  [0603]  26.11,137.4 90 top
R53  10k  [0603]  24.11,137.4 270 top
R54  100k  [0603]  51.61,135.4 0 top
R55  1k  [0603]  47.61,138.4 90 top
R56  390k  [0603]  74.62,125.4 90 top
R57  10k  [0603]  76.12,137.4 90 top
R58  10k  [0603]  74.12,137.4 270 top
R59  100k  [0603]  101.62,135.4 0 top
R60  1k  [0603]  97.62,138.4 90 top
R61  390k  [0603]  24.61,147.91 90 top
R62  10k  [0603]  26.11,159.91 90 top
R63  10k  [0603]  24.11,159.91 270 top
R64  100k  [0603]  51.61,157.91 0 top
R65  1k  [0603]  47.61,160.91 90 top
R66  390k  [0603]  74.62,147.91 90 top
R67  10k  [0603]  76.12,159.91 90 top
R68  10k  [0603]  74.12,159.91 270 top
R69  100k  [0603]  101.62,157.91 0 top
R70  1k  [0603]  97.62,160.91 90 top
R71  390k  [0603]  24.61,170.41 90 top
R72  10k  [0603]  26.11,182.41 90 top
R73  10k  [0603]  24.11,182.41 270 top
R74  100k  [0603]  51.61,180.41 0 top
R75  1k  [0603]  47.61,183.41 90 top
R76  390k  [0603]  74.62,170.41 90 top
R77  10k  [0603]  76.12,182.41 90 top
R78  10k  [0603]  74.12,182.41 270 top
R79  100k  [0603]  101.62,180.41 0 top
R80  1k  [0603]  97.62,183.41 90 top
S1  MOMENTARY-SWITCH-SPST-SMD-5.2MM-TALL  [TACTILE_SWITCH_SMD_5.2MM]  13.61,25.86 180 top
S2  MOMENTARY-SWITCH-SPST-SMD-5.2MM-TALL  [TACTILE_SWITCH_SMD_5.2MM]  63.62,25.86 180 top
S3  MOMENTARY-SWITCH-SPST-SMD-5.2MM-TALL  [TACTILE_SWITCH_SMD_5.2MM]  13.61,48.36 180 top
S4  MOMENTARY-SWITCH-SPST-SMD-5.2MM-TALL  [TACTILE_SWITCH_SMD_5.2MM]  63.62,48.36 180 top
S5  MOMENTARY-SWITCH-SPST-SMD-5.2MM-TALL  [TACTILE_SWITCH_SMD_5.2MM]  13.61,70.87 180 top
S6  MOMENTARY-SWITCH-SPST-SMD-5.2MM-TALL  [TACTILE_SWITCH_SMD_5.2MM]  63.62,70.87 180 top
S7  MOMENTARY-SWITCH-SPST-SMD-5.2MM-TALL  [TACTILE_SWITCH_SMD_5.2MM]  13.61,93.38 180 top
S8  MOMENTARY-SWITCH-SPST-SMD-5.2MM-TALL  [TACTILE_SWITCH_SMD_5.2MM]  63.62,93.38 180 top
S9  MOMENTARY-SWITCH-SPST-SMD-5.2MM-TALL  [TACTILE_SWITCH_SMD_5.2MM]  13.61,115.89 180 top
S10  MOMENTARY-SWITCH-SPST-SMD-5.2MM-TALL  [TACTILE_SWITCH_SMD_5.2MM]  63.62,115.89 180 top
S11  MOMENTARY-SWITCH-SPST-SMD-5.2MM-TALL  [TACTILE_SWITCH_SMD_5.2MM]  13.61,138.4 180 top
S12  MOMENTARY-SWITCH-SPST-SMD-5.2MM-TALL  [TACTILE_SWITCH_SMD_5.2MM]  63.62,138.4 180 top
S13  MOMENTARY-SWITCH-SPST-SMD-5.2MM-TALL  [TACTILE_SWITCH_SMD_5.2MM]  13.61,160.91 180 top
S14  MOMENTARY-SWITCH-SPST-SMD-5.2MM-TALL  [TACTILE_SWITCH_SMD_5.2MM]  63.62,160.91 180 top
S15  MOMENTARY-SWITCH-SPST-SMD-5.2MM-TALL  [TACTILE_SWITCH_SMD_5.2MM]  13.61,183.41 180 top
S16  MOMENTARY-SWITCH-SPST-SMD-5.2MM-TALL  [TACTILE_SWITCH_SMD_5.2MM]  63.62,183.41 180 top
U1  LIS2DH12NS  [LGA-12-LISDH12-NOSILK]  63.62,19.86 0 top
U2  LIS2DH12NS  [LGA-12-LISDH12-NOSILK]  13.61,42.36 0 top
U3  LIS2DH12NS  [LGA-12-LISDH12-NOSILK]  63.62,42.36 0 top
U4  LIS2DH12NS  [LGA-12-LISDH12-NOSILK]  13.61,64.87 0 top
U5  LIS2DH12NS  [LGA-12-LISDH12-NOSILK]  63.62,64.87 0 top
U6  LIS2DH12NS  [LGA-12-LISDH12-NOSILK]  13.61,87.38 0 top
U7  LIS2DH12NS  [LGA-12-LISDH12-NOSILK]  63.62,87.38 0 top
U8  LIS2DH12NS  [LGA-12-LISDH12-NOSILK]  13.61,109.89 0 top
U9  LIS2DH12NS  [LGA-12-LISDH12-NOSILK]  63.62,109.89 0 top
U10  LIS2DH12NS  [LGA-12-LISDH12-NOSILK]  13.61,132.4 0 top
U11  LIS2DH12NS  [LGA-12-LISDH12-NOSILK]  63.62,132.4 0 top
U12  LIS2DH12NS  [LGA-12-LISDH12-NOSILK]  13.61,154.91 0 top
U13  LIS2DH12NS  [LGA-12-LISDH12-NOSILK]  13.61,19.86 0 top
U14  LIS2DH12NS  [LGA-12-LISDH12-NOSILK]  63.62,154.91 0 top
U15  LIS2DH12NS  [LGA-12-LISDH12-NOSILK]  13.61,177.41 0 top
U16  LIS2DH12NS  [LGA-12-LISDH12-NOSILK]  63.62,177.41 0 top
U$1  [SD#DIS0]  40.61,23.16 0 top
U$2  [OVERLAY0]  31.61,16.74 0 top
U$3  [DISPLAY0]  17.67,7.86 0 top
U$4  [SD1]  13.37,7.86 0 top
U$5  [RTK5#SVG0]  20.11,21.86 0 top
U$6  [DISPLAY0]  67.68,7.86 0 top
U$7  [#ADR#0]  35.11,11.86 0 bottom
U$8  [CHARGE0]  51.61,23.86 0 bottom
U$9  [POWER0]  17.91,26.04 90 top
U$10  [X0]  24.94,18.67 180 top
U$11  [Y1]  27.54,21.37 0 top
U$12  [Z2]  23.44,21.27 180 top
U$13  [RTK_FACET0]  15.11,9.27 0 top
U$14  [3V33]  10.67,13.21 0 bottom
U$15  [GND2]  10.67,10.67 0 bottom
U$16  [SCL0]  10.67,18.29 0 bottom
U$17  [SDA1]  10.67,15.75 0 bottom
U$18  [SD1]  63.38,7.86 0 top
U$19  [#ADR#0]  85.12,11.86 0 bottom
U$20  [SD#DIS0]  90.62,23.16 0 top
U$21  [CHARGE0]  101.62,23.86 0 bottom
U$22  [OVERLAY0]  81.62,16.74 0 top
U$23  [POWER0]  67.91,26.04 90 top
U$24  [X0]  74.95,18.67 180 top
U$25  [Y1]  77.55,21.37 0 top
U$26  [Z2]  73.45,21.27 180 top
U$27  [RTK_FACET0]  65.12,9.27 0 top
U$28  [RTK5#SVG0]  70.12,21.86 0 top
U$29  [3V33]  60.68,13.21 0 bottom
U$30  [GND2]  60.68,10.67 0 bottom
U$31  [SCL0]  60.68,18.29 0 bottom
U$32  [SDA1]  60.68,15.75 0 bottom
U$33  [DISPLAY0]  17.67,30.36 0 top
U$34  [SD1]  13.37,30.36 0 top
U$35  [#ADR#0]  35.11,34.36 0 bottom
U$36  [SD#DIS0]  40.61,45.66 0 top
U$37  [CHARGE0]  51.61,46.36 0 bottom
U$38  [OVERLAY0]  31.61,39.24 0 top
U$39  [POWER0]  17.91,48.54 90 top
U$40  [X0]  24.94,41.17 180 top
U$41  [Y1]  27.54,43.87 0 top
U$42  [Z2]  23.44,43.77 180 top
U$43  [RTK_FACET0]  15.11,31.78 0 top
U$44  [RTK5#SVG0]  20.11,44.36 0 top
U$45  [3V33]  10.67,35.71 0 bottom
U$46  [GND2]  10.67,33.17 0 bottom
U$47  [SCL0]  10.67,40.79 0 bottom
U$48  [SDA1]  10.67,38.25 0 bottom
U$49  [DISPLAY0]  67.68,30.36 0 top
U$50  [SD1]  63.38,30.36 0 top
U$51  [#ADR#0]  85.12,34.36 0 bottom
U$52  [SD#DIS0]  90.62,45.66 0 top
U$53  [CHARGE0]  101.62,46.36 0 bottom
U$54  [OVERLAY0]  81.62,39.24 0 top
U$55  [POWER0]  67.91,48.54 90 top
U$56  [X0]  74.95,41.17 180 top
U$57  [Y1]  77.55,43.87 0 top
U$58  [Z2]  73.45,43.77 180 top
U$59  [RTK_FACET0]  65.12,31.78 0 top
U$60  [RTK5#SVG0]  70.12,44.36 0 top
U$61  [3V33]  60.68,35.71 0 bottom
U$62  [GND2]  60.68,33.17 0 bottom
U$63  [SCL0]  60.68,40.79 0 bottom
U$64  [SDA1]  60.68,38.25 0 bottom
U$65  [DISPLAY0]  17.67,52.87 0 top
U$66  [SD1]  13.37,52.87 0 top
U$67  [#ADR#0]  35.11,56.87 0 bottom
U$68  [SD#DIS0]  40.61,68.17 0 top
U$69  [CHARGE0]  51.61,68.87 0 bottom
U$70  [OVERLAY0]  31.61,61.75 0 top
U$71  [POWER0]  17.91,71.05 90 top
U$72  [X0]  24.94,63.68 180 top
U$73  [Y1]  27.54,66.38 0 top
U$74  [Z2]  23.44,66.28 180 top
U$75  [RTK_FACET0]  15.11,54.29 0 top
U$76  [RTK5#SVG0]  20.11,66.87 0 top
U$77  [3V33]  10.67,58.22 0 bottom
U$78  [GND2]  10.67,55.68 0 bottom
U$79  [SCL0]  10.67,63.3 0 bottom
U$80  [SDA1]  10.67,60.76 0 bottom
U$81  [DISPLAY0]  67.68,52.87 0 top
U$82  [SD1]  63.38,52.87 0 top
U$83  [#ADR#0]  85.12,56.87 0 bottom
U$84  [SD#DIS0]  90.62,68.17 0 top
U$85  [CHARGE0]  101.62,68.87 0 bottom
U$86  [OVERLAY0]  81.62,61.75 0 top
U$87  [POWER0]  67.91,71.05 90 top
U$88  [X0]  74.95,63.68 180 top
U$89  [Y1]  77.55,66.38 0 top
U$90  [Z2]  73.45,66.28 180 top
U$91  [RTK_FACET0]  65.12,54.29 0 top
U$92  [RTK5#SVG0]  70.12,66.87 0 top
U$93  [3V33]  60.68,58.22 0 bottom
U$94  [GND2]  60.68,55.68 0 bottom
U$95  [SCL0]  60.68,63.3 0 bottom
U$96  [SDA1]  60.68,60.76 0 bottom
U$97  [DISPLAY0]  17.67,75.38 0 top
U$98  [SD1]  13.37,75.38 0 top
U$99  [#ADR#0]  35.11,79.38 0 bottom
U$100  [SD#DIS0]  40.61,90.68 0 top
U$101  [CHARGE0]  51.61,91.38 0 bottom
U$102  [OVERLAY0]  31.61,84.26 0 top
U$103  [POWER0]  17.91,93.56 90 top
U$104  [X0]  24.94,86.19 180 top
U$105  [Y1]  27.54,88.89 0 top
U$106  [Z2]  23.44,88.79 180 top
U$107  [RTK_FACET0]  15.11,76.79 0 top
U$108  [RTK5#SVG0]  20.11,89.38 0 top
U$109  [3V33]  10.67,80.73 0 bottom
U$110  [GND2]  10.67,78.19 0 bottom
U$111  [SCL0]  10.67,85.81 0 bottom
U$112  [SDA1]  10.67,83.27 0 bottom
U$113  [DISPLAY0]  67.68,75.38 0 top
U$114  [SD1]  63.38,75.38 0 top
U$115  [#ADR#0]  85.12,79.38 0 bottom
U$116  [SD#DIS0]  90.62,90.68 0 top
U$117  [CHARGE0]  101.62,91.38 0 bottom
U$118  [OVERLAY0]  81.62,84.26 0 top
U$119  [POWER0]  67.91,93.56 90 top
U$120  [X0]  74.95,86.19 180 top
U$121  [Y1]  77.55,88.89 0 top
U$122  [Z2]  73.45,88.79 180 top
U$123  [RTK_FACET0]  65.12,76.79 0 top
U$124  [RTK5#SVG0]  70.12,89.38 0 top
U$125  [3V33]  60.68,80.73 0 bottom
U$126  [GND2]  60.68,78.19 0 bottom
U$127  [SCL0]  60.68,85.81 0 bottom
U$128  [SDA1]  60.68,83.27 0 bottom
U$129  [DISPLAY0]  17.67,97.89 0 top
U$130  [SD1]  13.37,97.89 0 top
U$131  [#ADR#0]  35.11,101.89 0 bottom
U$132  [SD#DIS0]  40.61,113.19 0 top
U$133  [CHARGE0]  51.61,113.89 0 bottom
U$134  [OVERLAY0]  31.61,106.77 0 top
U$135  [POWER0]  17.91,116.07 90 top
U$136  [X0]  24.94,108.7 180 top
U$137  [Y1]  27.54,111.4 0 top
U$138  [Z2]  23.44,111.3 180 top
U$139  [RTK_FACET0]  15.11,99.3 0 top
U$140  [RTK5#SVG0]  20.11,111.89 0 top
U$141  [3V33]  10.67,103.24 0 bottom
U$142  [GND2]  10.67,100.7 0 bottom
U$143  [SCL0]  10.67,108.32 0 bottom
U$144  [SDA1]  10.67,105.78 0 bottom
U$145  [DISPLAY0]  67.68,97.89 0 top
U$146  [SD1]  63.38,97.89 0 top
U$147  [#ADR#0]  85.12,101.89 0 bottom
U$148  [SD#DIS0]  90.62,113.19 0 top
U$149  [CHARGE0]  101.62,113.89 0 bottom
U$150  [OVERLAY0]  81.62,106.77 0 top
U$151  [POWER0]  67.91,116.07 90 top
U$152  [X0]  74.95,108.7 180 top
U$153  [Y1]  77.55,111.4 0 top
U$154  [Z2]  73.45,111.3 180 top
U$155  [RTK_FACET0]  65.12,99.3 0 top
U$156  [RTK5#SVG0]  70.12,111.89 0 top
U$157  [3V33]  60.68,103.24 0 bottom
U$158  [GND2]  60.68,100.7 0 bottom
U$159  [SCL0]  60.68,108.32 0 bottom
U$160  [SDA1]  60.68,105.78 0 bottom
U$161  [DISPLAY0]  17.67,120.4 0 top
U$162  [SD1]  13.37,120.4 0 top
U$163  [#ADR#0]  35.11,124.4 0 bottom
U$164  [SD#DIS0]  40.61,135.7 0 top
U$165  [CHARGE0]  51.61,136.4 0 bottom
U$166  [OVERLAY0]  31.61,129.28 0 top
U$167  [POWER0]  17.91,138.57 90 top
U$168  [X0]  24.94,131.21 180 top
U$169  [Y1]  27.54,133.91 0 top
U$170  [Z2]  23.44,133.81 180 top
U$171  [RTK_FACET0]  15.11,121.81 0 top
U$172  [RTK5#SVG0]  20.11,134.4 0 top
U$173  [3V33]  10.67,125.75 0 bottom
U$174  [GND2]  10.67,123.21 0 bottom
U$175  [SCL0]  10.67,130.83 0 bottom
U$176  [SDA1]  10.67,128.29 0 bottom
U$177  [DISPLAY0]  67.68,120.4 0 top
U$178  [SD1]  63.38,120.4 0 top
U$179  [#ADR#0]  85.12,124.4 0 bottom
U$180  [SD#DIS0]  90.62,135.7 0 top
U$181  [CHARGE0]  101.62,136.4 0 bottom
U$182  [OVERLAY0]  81.62,129.28 0 top
U$183  [POWER0]  67.91,138.57 90 top
U$184  [X0]  74.95,131.21 180 top
U$185  [Y1]  77.55,133.91 0 top
U$186  [Z2]  73.45,133.81 180 top
U$187  [RTK_FACET0]  65.12,121.81 0 top
U$188  [RTK5#SVG0]  70.12,134.4 0 top
U$189  [3V33]  60.68,125.75 0 bottom
U$190  [GND2]  60.68,123.21 0 bottom
U$191  [SCL0]  60.68,130.83 0 bottom
U$192  [SDA1]  60.68,128.29 0 bottom
U$193  [DISPLAY0]  17.67,142.91 0 top
U$194  [SD1]  13.37,142.91 0 top
U$195  [#ADR#0]  35.11,146.91 0 bottom
U$196  [SD#DIS0]  40.61,158.21 0 top
U$197  [CHARGE0]  51.61,158.91 0 bottom
U$198  [OVERLAY0]  31.61,151.79 0 top
U$199  [POWER0]  17.91,161.08 90 top
U$200  [X0]  24.94,153.72 180 top
U$201  [Y1]  27.54,156.42 0 top
U$202  [Z2]  23.44,156.32 180 top
U$203  [RTK_FACET0]  15.11,144.32 0 top
U$204  [RTK5#SVG0]  20.11,156.91 0 top
U$205  [3V33]  10.67,148.26 0 bottom
U$206  [GND2]  10.67,145.72 0 bottom
U$207  [SCL0]  10.67,153.34 0 bottom
U$208  [SDA1]  10.67,150.8 0 bottom
U$209  [DISPLAY0]  67.68,142.91 0 top
U$210  [SD1]  63.38,142.91 0 top
U$211  [#ADR#0]  85.12,146.91 0 bottom
U$212  [SD#DIS0]  90.62,158.21 0 top
U$213  [CHARGE0]  101.62,158.91 0 bottom
U$214  [OVERLAY0]  81.62,151.79 0 top
U$215  [POWER0]  67.91,161.08 90 top
U$216  [X0]  74.95,153.72 180 top
U$217  [Y1]  77.55,156.42 0 top
U$218  [Z2]  73.45,156.32 180 top
U$219  [RTK_FACET0]  65.12,144.32 0 top
U$220  [RTK5#SVG0]  70.12,156.91 0 top
U$221  [3V33]  60.68,148.26 0 bottom
U$222  [GND2]  60.68,145.72 0 bottom
U$223  [SCL0]  60.68,153.34 0 bottom
U$224  [SDA1]  60.68,150.8 0 bottom
U$225  [DISPLAY0]  17.67,165.41 0 top
U$226  [SD1]  13.37,165.41 0 top
U$227  [#ADR#0]  35.11,169.41 0 bottom
U$228  [SD#DIS0]  40.61,180.71 0 top
U$229  [CHARGE0]  51.61,181.41 0 bottom
U$230  [OVERLAY0]  31.61,174.29 0 top
U$231  [POWER0]  17.91,183.59 90 top
U$232  [X0]  24.94,176.22 180 top
U$233  [Y1]  27.54,178.92 0 top
U$234  [Z2]  23.44,178.82 180 top
U$235  [RTK_FACET0]  15.11,166.83 0 top
U$236  [RTK5#SVG0]  20.11,179.41 0 top
U$237  [3V33]  10.67,170.76 0 bottom
U$238  [GND2]  10.67,168.22 0 bottom
U$239  [SCL0]  10.67,175.84 0 bottom
U$240  [SDA1]  10.67,173.3 0 bottom
U$241  [DISPLAY0]  67.68,165.41 0 top
U$242  [SD1]  63.38,165.41 0 top
U$243  [#ADR#0]  85.12,169.41 0 bottom
U$244  [SD#DIS0]  90.62,180.71 0 top
U$245  [CHARGE0]  101.62,181.41 0 bottom
U$246  [OVERLAY0]  81.62,174.29 0 top
U$247  [POWER0]  67.91,183.59 90 top
U$248  [X0]  74.95,176.22 180 top
U$249  [Y1]  77.55,178.92 0 top
U$250  [Z2]  73.45,178.82 180 top
U$251  [RTK_FACET0]  65.12,166.83 0 top
U$252  [RTK5#SVG0]  70.12,179.41 0 top
U$253  [3V33]  60.68,170.76 0 bottom
U$254  [GND2]  60.68,168.22 0 bottom
U$255  [SCL0]  60.68,175.84 0 bottom
U$256  [SDA1]  60.68,173.3 0 bottom

## Library data of the parts
C1 C9 C20 C31 C41 C51 C61 C71 C81 C91 C101 C111 C121 C131 C141 C151 = SparkFun-Capacitors; PROD_ID: CAP-11624
C2 C3 C10 C11 C21 C22 C32 C33 C42 C43 C52 C53 C62 C63 C72 C73 C82 C83 C92 C93 C102 C103 C112 C113 C122 C123 C132 C133 C142 C143 C152 C153 = SparkFun-Capacitors; PROD_ID: CAP-08064
C4 C6 C7 C12 C14 C15 C23 C25 C26 C34 C36 C37 C44 C46 C47 C54 C56 C57 C64 C66 C67 C74 C76 C77 C84 C86 C87 C94 C96 C97 C104 C106 C107 C114 C116 C117 C124 C126 C127 C134 C136 C137 C144 C146 C147 C154 C156 C157 = SparkFun-Capacitors; PROD_ID: CAP-00868
C5 C13 C24 C35 C45 C55 C65 C75 C85 C95 C105 C115 C125 C135 C145 C155 = SparkFun-Capacitors; PROD_ID: CAP-10300
C8 C19 C30 C40 C50 C60 C70 C80 C90 C100 C110 C120 C130 C140 C150 C160 = SparkFun-Capacitors; PROD_ID: CAP-11015
C16-C18 C27-C29 C38 C39 C48 C49 C58 C59 C68 C69 C78 C79 C88 C89 C98 C99 C108 C109 C118 C119 C128 C129 C138 C139 C148 C149 C158 C159 = SparkFun-Capacitors; PROD_ID: CAP-00810
D1-D16 = SparkFun-LED; PROD_ID: DIO-11076
E$1-E$4 FID1-FID64 LOGO1-LOGO32 = SparkFun-Aesthetics
E$5 E$6 = SparkFun-Retired
J1 J4 J7 J10 J13 J16 J19 J22 J25 J28 J31 J34 J37 J40 J43 J46 = RTK Facet; PROD_ID: CONN-15766
J2 J5 J8 J11 J14 J17 J20 J23 J26 J29 J32 J35 J38 J41 J44 J47 = SparkFun-Connectors; PROD_ID: CONN-16110
J3 J6 J9 J12 J15 J18 J21 J24 J27 J30 J33 J36 J39 J42 J45 J48 = SparkFun-Connectors
JP1 JP4 JP6 JP8 JP10 JP12 JP14 JP16 JP18 JP20 JP22 JP24 JP26 JP28 JP30 JP32 = SparkFun-Connectors; PROD_ID: CONN-16692
JP2 JP3 JP5 JP7 JP9 JP11 JP13 JP15 JP17 JP19 JP21 JP23 JP25 JP27 JP29 JP31 = SparkFun-Jumpers
OLED1-OLED16 = SparkFun-Displays; PROD_ID: LCD-12019
R1 R6 R11 R16 R21 R26 R31 R36 R41 R46 R51 R56 R61 R66 R71 R76 = SparkFun-Resistors; PROD_ID: RES-12024
R2 R3 R7 R8 R12 R13 R17 R18 R22 R23 R27 R28 R32 R33 R37 R38 R42 R43 R47 R48 R52 R53 R57 R58 R62 R63 R67 R68 R72 R73 R77 R78 = SparkFun-Resistors; PROD_ID: RES-00824
R4 R9 R14 R19 R24 R29 R34 R39 R44 R49 R54 R59 R64 R69 R74 R79 = SparkFun-Resistors; PROD_ID: RES-07828
R5 R10 R15 R20 R25 R30 R35 R40 R45 R50 R55 R60 R65 R70 R75 R80 = SparkFun-Resistors; PROD_ID: RES-07856
S1-S16 = SparkFun-Switches; PROD_ID: SWCH-14139
U1-U16 = SparkFun-Sensors; PROD_ID: IC-14229
U$1-U$256 = output